# EAGLE board Sensors Panel (EAGLE 5.10), part 1 of 2
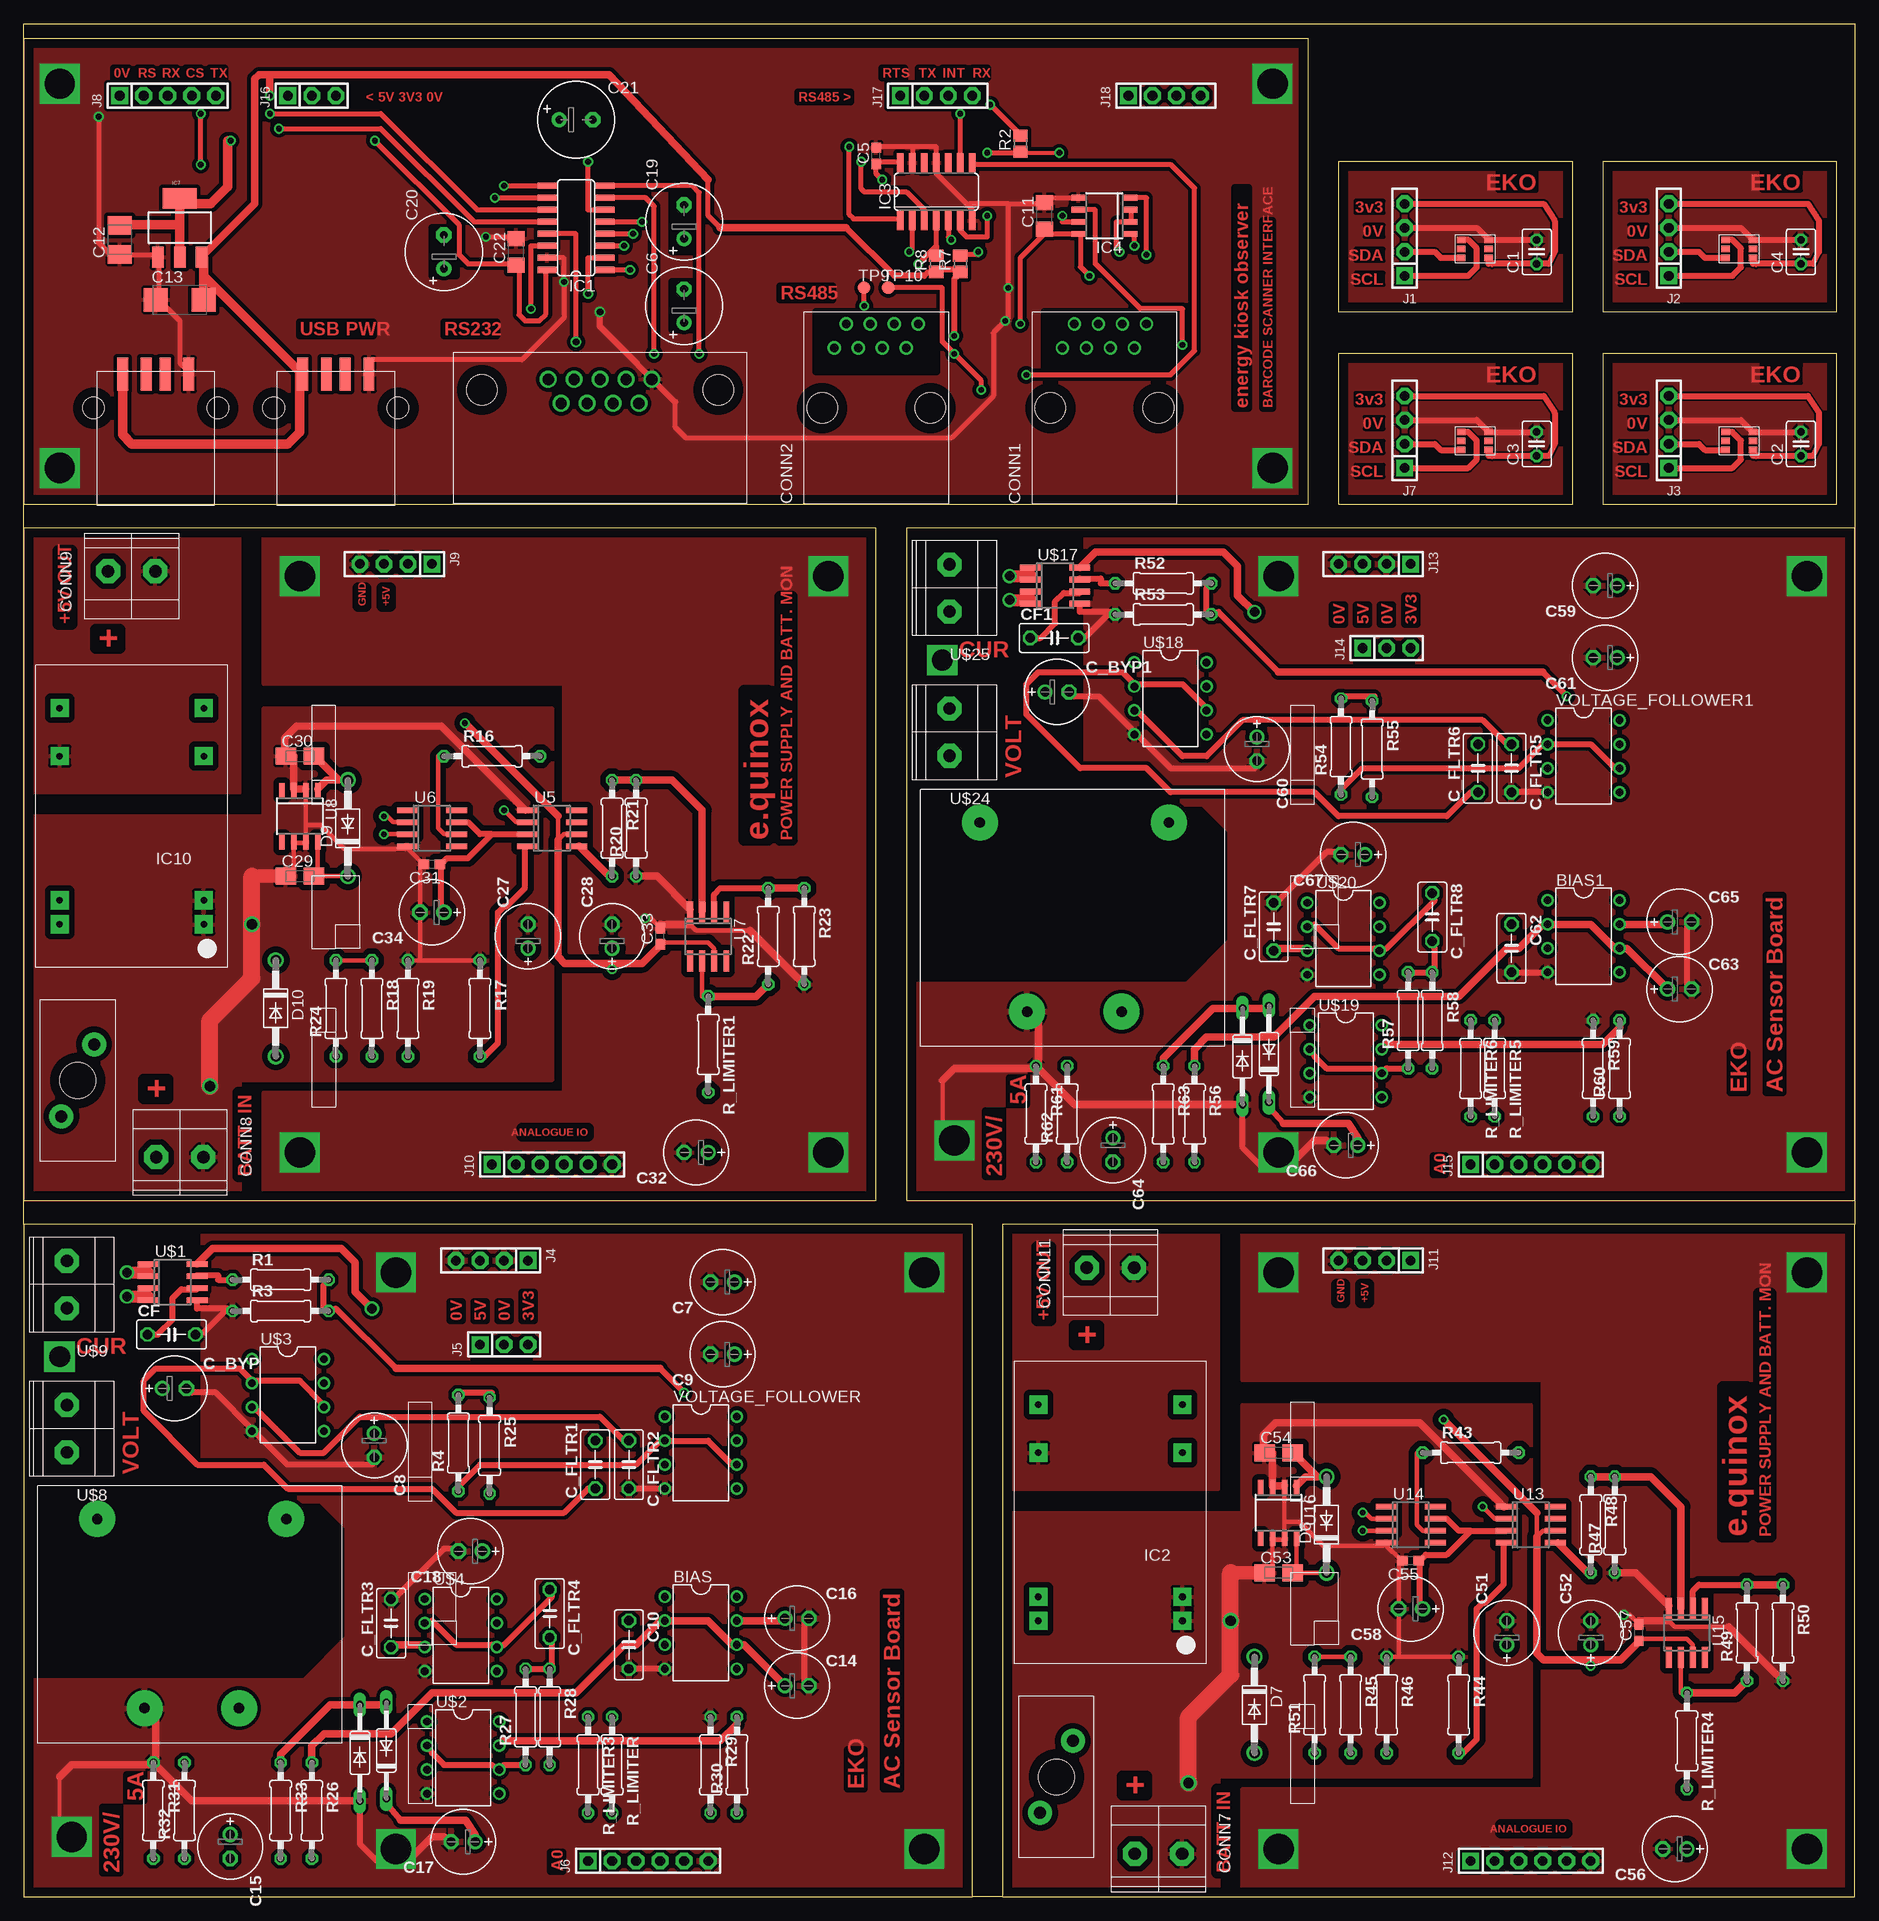
[diagram p0: board, top side]
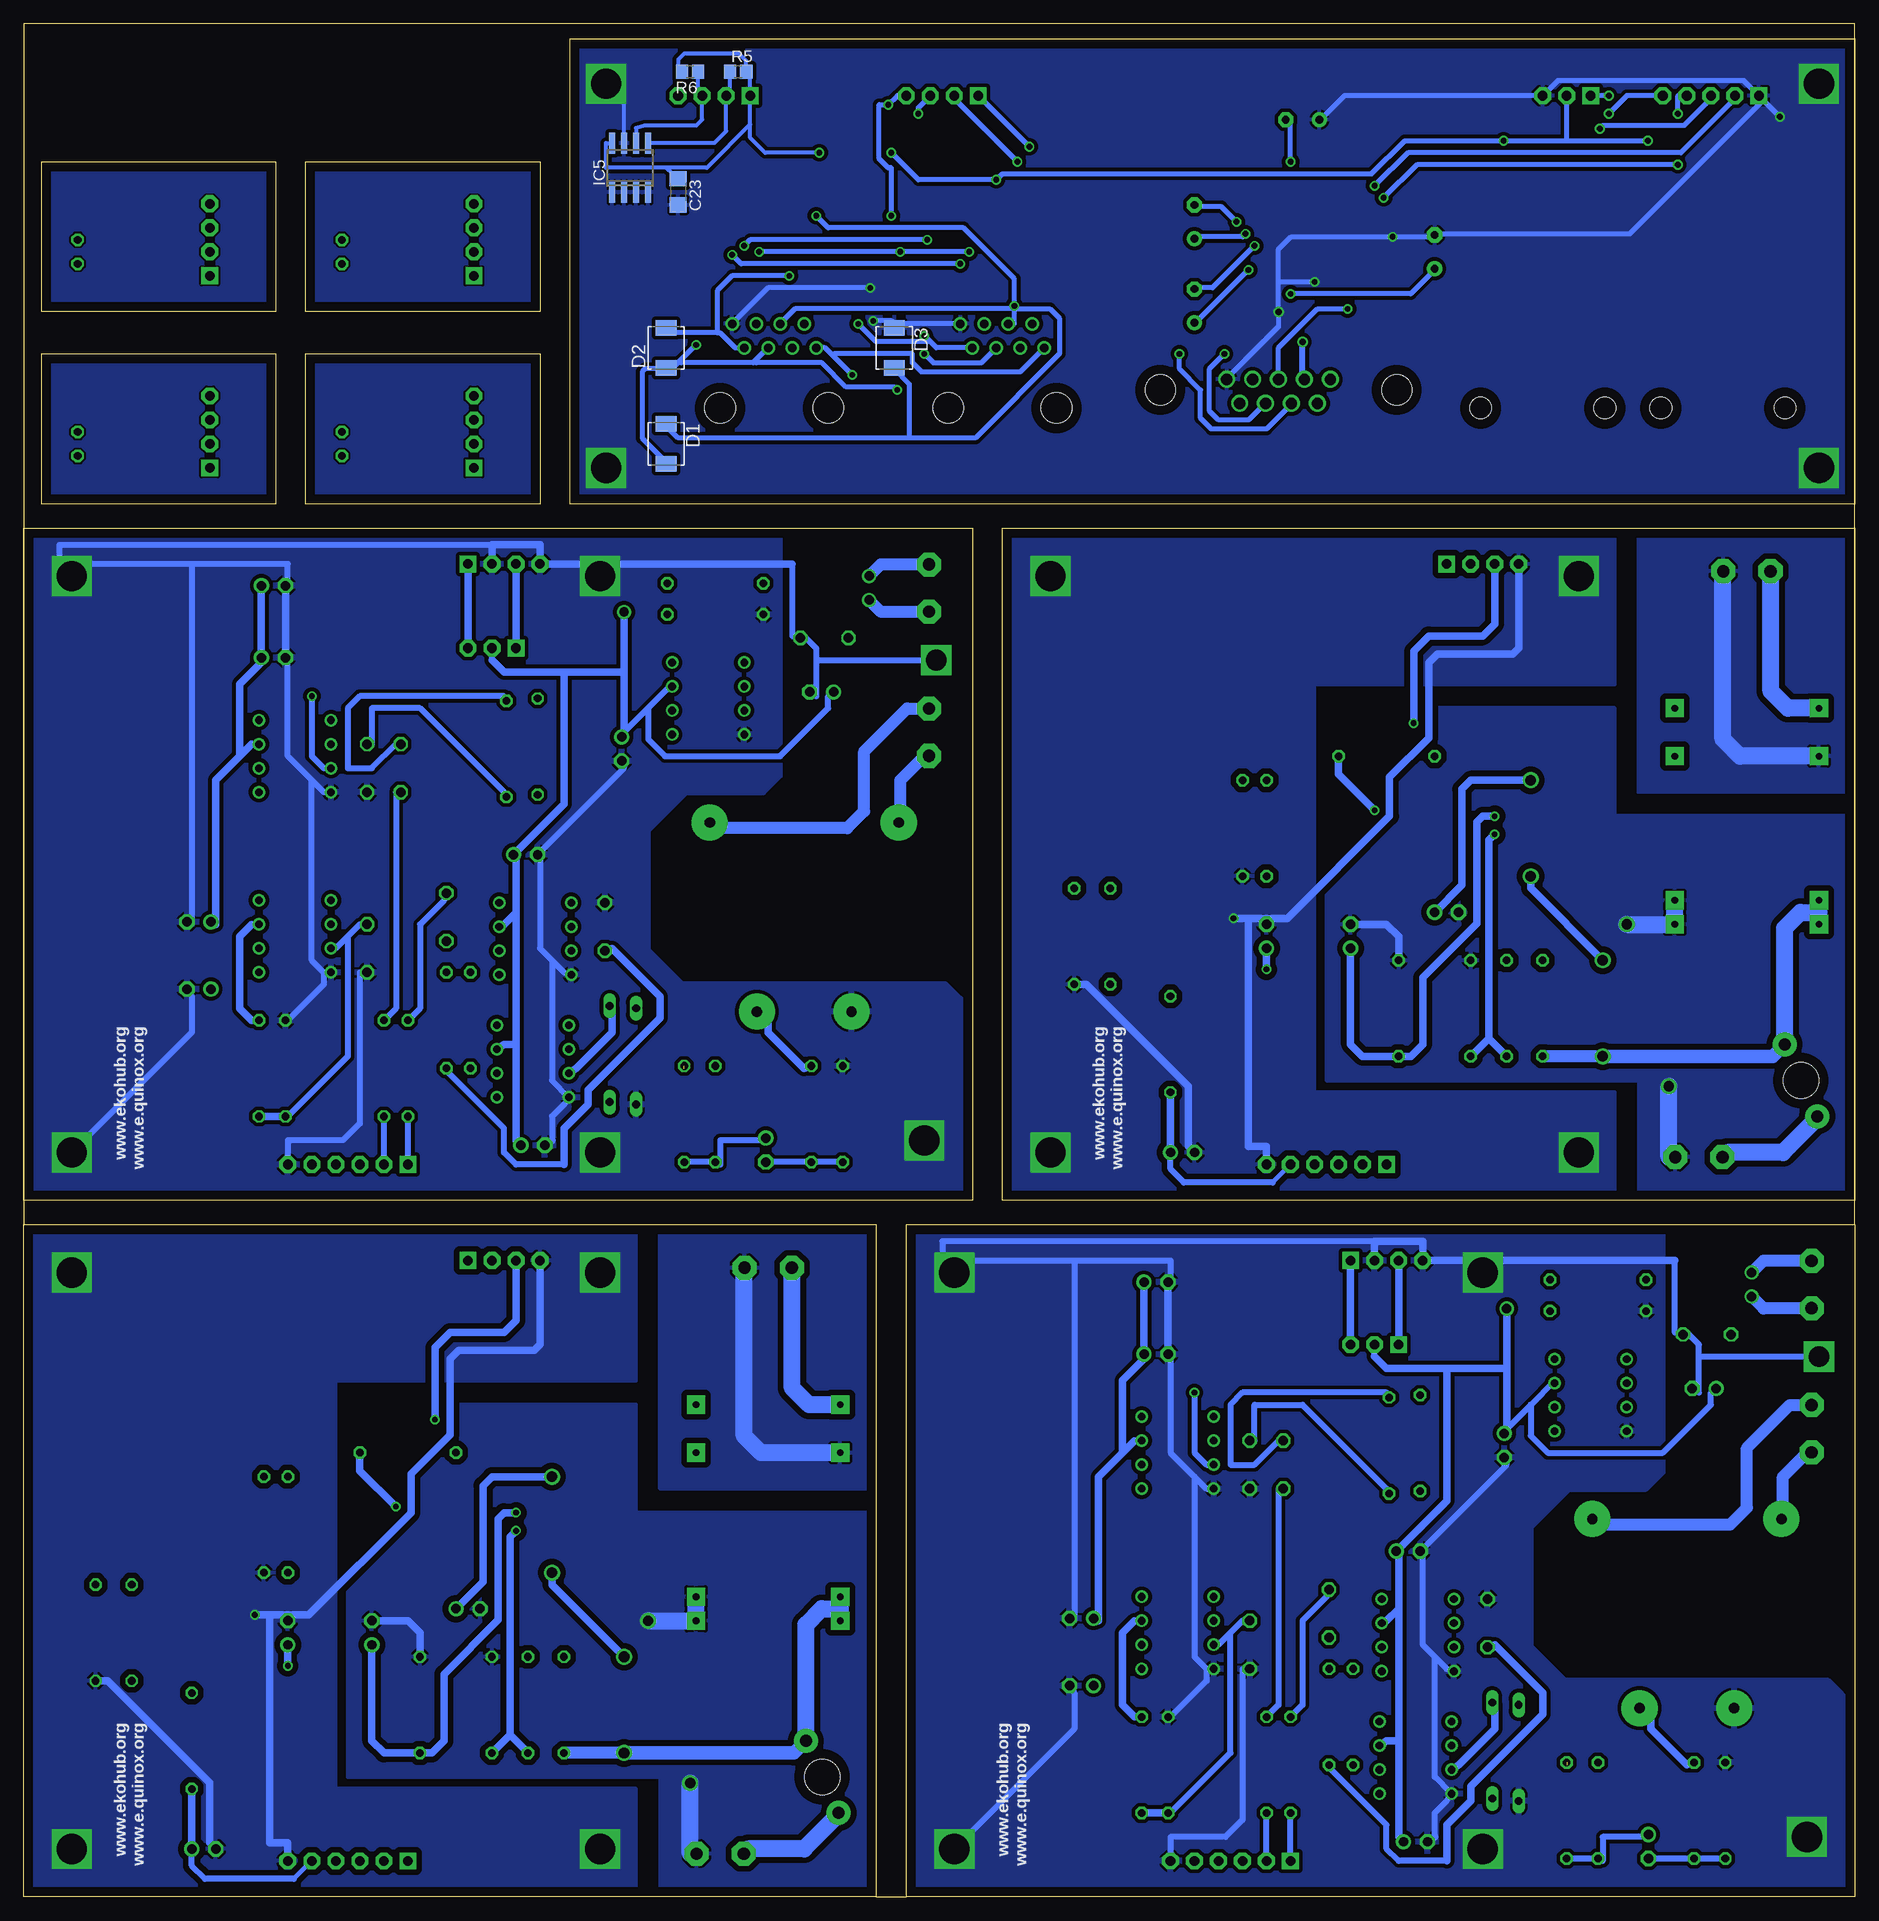
[diagram p1: board, bottom side, seen from below]

Size 193.68 x 198.12 mm. Coordinates in mm from the lower left corner, seen from the top.
Outline: 0,71.12 0,198.12 193.68,198.12 193.68,71.12
Outline: 103.5,0 100.33,0
Outline: 100.33,0 100.33,71.12 0,71.12
Outline: 0,71.12 0,0 100.33,0
Outline: 193.68,71.12 193.68,0 103.5,0
Outline: 193.68,71.12 103.5,71.12 103.5,0
Outline: 90.17,73.66 90.17,144.78 0,144.78 0,73.66 90.17,73.66
Outline: 193.68,73.66 193.68,144.78 93.34,144.78 93.34,73.66 193.68,73.66
Outline: 191.77,167.64 191.77,183.51 167,183.51 167,167.64 191.77,167.64
Outline: 163.83,167.64 163.83,183.51 139.06,183.51 139.06,167.64 163.83,167.64
Outline: 191.77,147.32 191.77,163.19 167,163.19 167,147.32 191.77,147.32
Outline: 163.83,147.32 163.83,163.19 139.06,163.19 139.06,147.32 163.83,147.32
Outline: 0,147.32 135.87,147.32 135.87,196.52 0,196.52 0,147.32
Copper layers (1*16): Top 0.035mm / dielectric 1.5mm / Bottom 0.035mm
Design rules "default": minimum track width 10mil, minimum drill 24mil, track to track 8mil, track to pad 8mil, pad to pad 8mil, via to via 8mil, smd to smd 8mil, copper to edge 40mil, drill to drill 8mil, minimum pad ring 10mil, minimum via ring 8mil, stop-mask expansion 4mil, vias tented up to drill 0mil, thermal gap 10mil
tRestrict: area 83.8,161.3 to 96.5,167.6; area 108,161.3 to 120.7,167.6; area 68.6,174 to 71.1,180.3; area 43.2,171.5 to 45.7,176.5; area 68.6,165.7 to 71.1,170.8; area 55.9,186.7 to 61,189.2; area 91.4,189.2 to 101.6,191.8; area 26.7,189.2 to 34.3,191.8; area 8.9,189.2 to 21.6,191.8
vRestrict: area 25.4,48.3 to 30.5,58.4; area 43.2,8.9 to 50.8,20.3; area 43.2,21.6 to 49.5,33; area 67.1,41.9 to 74.7,52.1; area 68.6,22.9 to 74.9,33; area 118.7,121.9 to 123.8,132.1; area 136.5,82.5 to 144.1,94; area 136.5,95.3 to 142.9,106.7; area 160.4,115.6 to 168,125.7; area 161.9,96.5 to 168.3,106.7; area 26.7,147.3 to 39.4,161.3; area 7.6,147.3 to 20.3,161.3; 10 more areas

## Footprints (pad centres in the part's own frame; a part is rotated, then mirrored left to right if it is on the bottom)
PDIP8 = drill 0.813 pad 1.27 round: 1 -3.81,-3.81; 2 -1.27,-3.81; 3 1.27,-3.81; 4 3.81,-3.81; 5 3.81,3.81; 6 1.27,3.81; 7 -1.27,3.81; 8 -3.81,3.81
C025-030X050 = drill 0.813 octagon: 1 -1.27,0; 2 1.27,0
C0603 = smd 1.1 x 1: 1 -0.85,0; 2 0.85,0
E3,5-8 = drill 0.813 pad 1.6 round: + -1.778,0 | drill 0.813 pad 1.6 octagon: - 1.778,0
E2,5-7---100UF = drill 1 pad 1.6 round: + -1.27,0 | drill 1 pad 1.6 octagon: - 1.27,0
C050-030-075 = drill 1 octagon: 1 -2.54,0; 2 2.54,0
C1206 = smd 1.6 x 1.8: 1 -1.4,0; 2 1.4,0
B/3528-21R = smd 1.95 x 2.5: + 1.525,0; - -1.525,0
C/6032-28R = smd 2.55 x 2.5: + 2.525,0; - -2.525,0
A/3216-18W = smd 2.15 x 1.8: + 1.475,0; - -1.475,0
MHRJJ8NFRA = drill 0.9 round: P$1 -4.445,6.35; P$2 -3.175,8.89; P$3 -1.905,6.35; P$4 -0.635,8.89; P$5 0.635,6.35; P$6 1.905,8.89; P$7 3.175,6.35; P$8 4.445,8.89 | hole 3.25: -5.715,0; 5.715,0
CTB1500-2 = drill 1.3 pad 2.54 octagon: P$1 -2.5,0.5; P$2 2.5,0.5
LTF153008 = drill 1.27 pad 2.54 round: 1 1.73,3.81; 2 -1.73,-3.81 | hole 3.78: 0,0
SMB = smd 1.62 x 2.18: 1 -2.11,0; 2 2.11,0
DO41-10 = drill 1.118 round: A 5.08,0; C -5.08,0
SO16 = smd 0.66 x 2.032: 1 -4.445,-3.073; 2 -3.175,-3.073; 3 -1.905,-3.073; 4 -0.635,-3.073; 5 0.635,-3.073; 6 1.905,-3.073; 7 3.175,-3.073; 8 4.445,-3.073; 9 4.445,3.073; 10 3.175,3.073; 11 1.905,3.073; 12 0.635,3.073; 13 -0.635,3.073; 14 -1.905,3.073; 15 -3.175,3.073; 16 -4.445,3.073
TEL_5_SERIES = drill 0.7 pad 1.93 square: 2 -11.43,-7.62; 3 -8.89,-7.62; 9 6.35,-7.62; 11 11.43,-7.62; 14 11.43,7.62; 16 6.35,7.62; 22 -8.89,7.62; 23 -11.43,7.62
SO14 = smd 0.66 x 2.032: 1 -3.81,-3.073; 2 -2.54,-3.073; 3 -1.27,-3.073; 4 0,-3.073; 5 1.27,-3.073; 6 2.54,-3.073; 7 3.81,-3.073; 8 3.81,3.073; 9 2.54,3.073; 10 1.27,3.073; 11 0,3.073; 12 -1.27,3.073; 13 -2.54,3.073; 14 -3.81,3.073
D_R-PDSO-G8 = smd 0.6 x 1.5: 1 -1.905,-2.75; 2 -0.635,-2.75; 3 0.635,-2.75; 4 1.905,-2.75; 5 1.905,2.75; 6 0.635,2.75; 7 -0.635,2.75; 8 -1.905,2.75
SO-08 = smd 0.6 x 2.2: 1 -1.905,-2.6; 2 -0.635,-2.6; 3 0.635,-2.6; 4 1.905,-2.6; 5 1.905,2.6; 6 0.635,2.6; 7 -0.635,2.6; 8 -1.905,2.6
SOT223 = smd 1.219 x 2.235: 1 -2.311,-3.099; 2 0,-3.099; 3 2.311,-3.099 | smd 3.6 x 2.2: 4 0,3.099
SIP-100-04-40 = drill 1.016 pad 1.778 square: 1 -3.81,0 | drill 1.016 pad 1.778 octagon: 2 -1.27,0; 3 1.27,0; 4 3.81,0
SIP-100-03-40 = drill 1.016 pad 1.778 square: 1 -2.54,0 | drill 1.016 pad 1.778 octagon: 2 0,0; 3 2.54,0
SIP-100-06-40 = drill 1.016 pad 1.778 square: 1 -6.35,0 | drill 1.016 pad 1.778 octagon: 2 -3.81,0; 3 -1.27,0; 4 1.27,0; 5 3.81,0; 6 6.35,0
SIP-100-05-40 = drill 1.016 pad 1.778 square: 1 -5.08,0 | drill 1.016 pad 1.778 octagon: 2 -2.54,0; 3 0,0; 4 2.54,0; 5 5.08,0
0207/10 = drill 0.8 octagon: 1 -5.08,0; 2 5.08,0
R0805 = smd 1.3 x 1.5: 1 -0.85,0; 2 0.85,0
DB9 = drill 1.19 round: 1 5.48,-1.12; 2 2.74,-1.12; 3 0,-1.12; 4 -2.74,-1.12; 5 -5.48,-1.12; 6 4.11,1.42; 7 1.37,1.42; 8 -1.37,1.42; 9 -4.11,1.42 | hole 3.2: -12.5,0; 12.5,0
TP13R = smd 1.3 x 1.3: TP 0,0
SO8 = smd 0.6 x 2.2: 1 -1.905,-2.6; 2 -0.635,-2.6; 3 0.635,-2.6; 4 1.905,-2.6; 5 1.905,2.6; 6 0.635,2.6; 7 -0.635,2.6; 8 -1.905,2.6
R_PDSO_G8 = smd 0.6 x 1.5: 1 -1.905,-2.75; 2 -0.635,-2.75; 3 0.635,-2.75; 4 1.905,-2.75; 5 1.905,2.75; 6 0.635,2.75; 7 -0.635,2.75; 8 -1.905,2.75
SOIC8 = smd 0.6 x 2.2: 1 -1.905,-2.6; 2 -0.635,-2.6; 3 0.635,-2.6; 4 1.905,-2.6; 5 1.905,2.6; 6 0.635,2.6; 7 -0.635,2.6; 8 -1.905,2.6
4408 = drill 1.1 pad 3.81 round: PIN1 -10,10; PIN5 10,10; PIN7 5,-10; PIN9 -5,-10
D035-10 = drill 0.813 long: A 4.318,0.762; C -5.842,0.762
TSL2561T = smd 0.9 x 0.7: ADDR_SEL 0,0.95; GND 0,0; INT 2.9,0.95; SCL 2.9,0; SDA 2.9,1.9; VDD 0,1.9
USB_SOCKET_LUMBERG = smd 1.15 x 3.5: 1 -3.5,3.56; 2 -1,3.56; 3 1,3.56; 4 3.5,3.56 | hole 2.3: -6.57,0; 6.57,0

## Placement (x,y rotation side)
BIAS  MCP601  [PDIP8]  71.63,27.94 270 top
BIAS1  MCP601  [PDIP8]  164.97,101.6 270 top
C1  [C025-030X050]  160.02,173.99 90 top
C2  [C025-030X050]  187.96,153.67 90 top
C3  [C025-030X050]  160.02,153.67 90 top
C4  [C025-030X050]  187.96,173.99 90 top
C5  [C0603]  90.17,184.15 90 top
C6  [E3,5-8]  69.85,168.28 90 top
C7  [E2,5-7---100UF]  73.91,65.02 180 top
C8  [E2,5-7---100UF]  37.08,47.75 270 top
C9  [E2,5-7---100UF]  73.91,57.4 180 top
C10  [C050-030-075]  64.01,26.67 270 top
C11  0.1uF  [C1206]  107.95,177.8 90 top
C12  100uF  [B/3528-21R]  10.16,175.26 90 top
C13  10uF  [C/6032-28R]  16.51,168.91 0 top
C14  [E2,5-7---100UF]  81.79,22.35 0 top
C15  [E2,5-7---100UF]  21.84,5.33 270 top
C16  [E2,5-7---100UF]  81.79,29.46 0 top
C17  [E2,5-7---100UF]  46.48,5.84 180 top
C18  [E2,5-7---100UF]  47.24,36.58 180 top
C19  [E3,5-8]  69.85,177.16 90 top
C20  [E3,5-8]  44.45,173.99 90 top
C21  [E3,5-8]  58.42,187.96 0 top
C22  0.1uF  [C1206]  52.07,173.99 90 top
C23  0.1uF  [C1206]  124.46,180.34 270 bottom
C27  [E2,5-7---100UF]  53.34,101.6 90 top
C28  [E2,5-7---100UF]  62.23,101.6 90 top
C29  0.33uF  [A/3216-18W]  29.21,107.95 0 top
C30  0.33uF  [A/3216-18W]  29.21,120.65 0 top
C31  [C0603]  43.18,109.22 180 top
C32  [E2,5-7---100UF]  71.12,78.74 180 top
C33  [C0603]  67.31,101.6 90 top
C34  [E2,5-7---100UF]  43.18,104.14 180 top
C51  [E2,5-7---100UF]  156.84,27.94 90 top
C52  [E2,5-7---100UF]  165.74,27.94 90 top
C53  0.33uF  [A/3216-18W]  132.72,34.29 0 top
C54  0.33uF  [A/3216-18W]  132.72,46.99 0 top
C55  [C0603]  146.69,35.56 180 top
C56  [E2,5-7---100UF]  174.62,5.08 180 top
C57  [C0603]  170.81,27.94 90 top
C58  [E2,5-7---100UF]  146.69,30.48 180 top
C59  [E2,5-7---100UF]  167.26,138.68 180 top
C60  [E2,5-7---100UF]  130.43,121.41 270 top
C61  [E2,5-7---100UF]  167.26,131.06 180 top
C62  [C050-030-075]  157.35,100.33 270 top
C63  [E2,5-7---100UF]  175.13,96.01 0 top
C64  [E2,5-7---100UF]  115.19,78.99 270 top
C65  [E2,5-7---100UF]  175.13,103.12 0 top
C66  [E2,5-7---100UF]  139.83,79.5 180 top
C67  [E2,5-7---100UF]  140.59,110.24 180 top
C_BYP  [E2,5-7---100UF]  15.94,53.79 0 top
C_BYP1  [E2,5-7---100UF]  109.29,127.45 0 top
C_FLTR1  [C050-030-075]  60.45,45.72 90 top
C_FLTR2  [C050-030-075]  64.01,45.72 270 top
C_FLTR3  [C050-030-075]  38.86,28.96 90 top
C_FLTR4  [C050-030-075]  55.63,29.97 270 top
C_FLTR5  [C050-030-075]  157.35,119.38 270 top
C_FLTR6  [C050-030-075]  153.8,119.38 90 top
C_FLTR7  [C050-030-075]  132.21,102.62 90 top
C_FLTR8  [C050-030-075]  148.97,103.63 270 top
CF  [C050-030-075]  15.64,59.49 0 top
CF1  [C050-030-075]  108.98,133.15 0 top
CONN1  MHRJJ88NFRA  [MHRJJ8NFRA]  114.3,157.48 0 top
CONN2  MHRJJ88NFRA  [MHRJJ8NFRA]  90.17,157.48 0 top
CONN7  CTB1500/2  [CTB1500-2]  120.02,5.08 180 top
CONN8  CTB1500/2  [CTB1500-2]  16.51,78.74 180 top
CONN9  CTB1500/2  [CTB1500-2]  11.43,139.7 0 top
CONN10  MINIBLADE_SOCKET  [LTF153008]  5.71,86.36 180 top
CONN11  CTB1500/2  [CTB1500-2]  114.94,66.04 0 top
CONN12  MINIBLADE_SOCKET  [LTF153008]  109.22,12.7 180 top
D1  P6SMB12CA  [SMB]  125.73,153.67 270 bottom
D2  P6SMB12CA  [SMB]  125.73,163.83 90 bottom
D3  P6SMB12CA  [SMB]  101.6,163.83 270 bottom
D6  1N4004  [DO41-10]  137.79,39.37 90 top
D7  1N4004  [DO41-10]  130.18,20.32 270 top
D9  1N4004  [DO41-10]  34.29,113.03 90 top
D10  1N4004  [DO41-10]  26.67,93.98 270 top
IC1  MAX3232CSE  [SO16]  58.42,176.53 90 top
IC2  [TEL_5_SERIES]  114.94,40.64 90 top
IC3  7407D  [SO14]  96.52,180.34 0 top
IC4  SP483E  [D_R-PDSO-G8]  114.3,177.8 90 top
IC5  24AA64SN  [SO-08]  129.54,182.88 0 bottom
IC7  TLV1117  [SOT223]  16.51,176.53 0 top
IC10  [TEL_5_SERIES]  11.43,114.3 90 top
J1  F-1X04-SIP-100-40  [SIP-100-04-40]  146.05,175.26 90 top
J2  F-1X04-SIP-100-40  [SIP-100-04-40]  173.99,175.26 90 top
J3  F-1X04-SIP-100-40  [SIP-100-04-40]  173.99,154.94 90 top
J4  F-1X04-SIP-100-40  [SIP-100-04-40]  49.53,67.31 180 top
J5  F-1X03-SIP-100-40  [SIP-100-03-40]  50.8,58.42 0 top
J6  F-1X06-SIP-100-40  [SIP-100-06-40]  66.04,3.81 0 top
J7  F-1X04-SIP-100-40  [SIP-100-04-40]  146.05,154.94 90 top
J8  F-1X05-SIP-100-40  [SIP-100-05-40]  15.24,190.5 0 top
J9  F-1X04-SIP-100-40  [SIP-100-04-40]  39.37,140.97 180 top
J10  F-1X06-SIP-100-40  [SIP-100-06-40]  55.88,77.47 0 top
J11  F-1X04-SIP-100-40  [SIP-100-04-40]  142.88,67.31 180 top
J12  F-1X06-SIP-100-40  [SIP-100-06-40]  159.38,3.81 0 top
J13  F-1X04-SIP-100-40  [SIP-100-04-40]  142.88,140.97 180 top
J14  F-1X03-SIP-100-40  [SIP-100-03-40]  144.15,132.08 0 top
J15  F-1X06-SIP-100-40  [SIP-100-06-40]  159.38,77.47 0 top
J16  F-1X03-SIP-100-40  [SIP-100-03-40]  30.48,190.5 0 top
J17  F-1X04-SIP-100-40  [SIP-100-04-40]  96.52,190.5 0 top
J18  F-1X04-SIP-100-40  [SIP-100-04-40]  120.65,190.5 0 top
R1  [0207/10]  27.18,65.28 0 top
R2  2.7K  [R0805]  105.41,185.42 90 top
R3  [0207/10]  27.18,61.98 0 top
R4  [0207/10]  45.97,48.01 90 top
R5  [R0805]  118.11,193.04 0 bottom
R6  [R0805]  123.19,193.04 180 bottom
R7  4.7k  [R0805]  99.06,172.72 90 top
R8  4.7k  [R0805]  96.52,172.72 90 top
R16  [0207/10]  49.53,120.65 0 top
R17  [0207/10]  48.26,93.98 270 top
R18  [0207/10]  36.83,93.98 270 top
R19  [0207/10]  40.64,93.98 270 top
R20  [0207/10]  64.77,113.03 90 top
R21  [0207/10]  62.23,113.03 270 top
R22  [0207/10]  78.74,101.6 90 top
R23  [0207/10]  82.55,101.6 270 top
R24  [0207/10]  33.02,93.98 90 top
R25  [0207/10]  49.28,47.75 270 top
R26  [0207/10]  30.48,9.14 270 top
R27  [0207/10]  53.09,19.05 90 top
R28  [0207/10]  55.63,19.05 270 top
R29  [0207/10]  72.64,13.97 270 top
R30  [0207/10]  75.44,13.97 90 top
R31  [0207/10]  13.72,9.14 270 top
R32  [0207/10]  17.02,9.14 90 top
R33  [0207/10]  27.18,9.14 270 top
R43  [0207/10]  153.03,46.99 0 top
R44  [0207/10]  151.76,20.32 270 top
R45  [0207/10]  140.34,20.32 270 top
R46  [0207/10]  144.15,20.32 270 top
R47  [0207/10]  168.28,39.37 90 top
R48  [0207/10]  165.74,39.37 270 top
R49  [0207/10]  182.25,27.94 90 top
R50  [0207/10]  186.06,27.94 270 top
R51  [0207/10]  136.53,20.32 90 top
R52  [0207/10]  120.52,138.94 0 top
R53  [0207/10]  120.52,135.64 0 top
R54  [0207/10]  139.32,121.67 90 top
R55  [0207/10]  142.62,121.41 270 top
R56  [0207/10]  123.83,82.8 270 top
R57  [0207/10]  146.43,92.71 90 top
R58  [0207/10]  148.97,92.71 270 top
R59  [0207/10]  165.99,87.63 270 top
R60  [0207/10]  168.78,87.63 90 top
R61  [0207/10]  107.06,82.8 270 top
R62  [0207/10]  110.36,82.8 90 top
R63  [0207/10]  120.52,82.8 270 top
R_LIMITER  [0207/10]  62.23,13.97 270 top
R_LIMITER1  [0207/10]  72.39,90.17 270 top
R_LIMITER3  [0207/10]  59.69,13.97 270 top
R_LIMITER4  [0207/10]  175.9,16.51 270 top
R_LIMITER5  [0207/10]  155.57,87.63 270 top
R_LIMITER6  [0207/10]  153.03,87.63 270 top
SERIAL1  DB9_CONN  [DB9]  60.96,159.38 180 top
TP9  TPTP13R  [TP13R]  88.9,170.18 0 top
TP10  TPTP13R  [TP13R]  91.44,170.18 0 top
U5  IL300  [SO8]  55.88,113.03 270 top
U6  MCP601  [SO8]  43.18,113.03 270 top
U7  MCP601  [SO8]  72.39,101.6 180 top
U8  UA7805  [R_PDSO_G8]  29.21,114.3 180 top
U13  IL300  [SO8]  159.38,39.37 270 top
U14  MCP601  [SO8]  146.69,39.37 270 top
U15  MCP601  [SO8]  175.9,27.94 180 top
U16  UA7805  [R_PDSO_G8]  132.72,40.64 180 top
U$1  ACS712  [SOIC8]  15.75,65.02 270 top
U$2  MCP601  [PDIP8]  46.48,14.73 270 top
U$3  MCP601  [PDIP8]  27.94,53.09 270 top
U$4  MCP601  [PDIP8]  46.23,27.69 270 top
U$5  [4408]  17.78,29.97 0 top
U$6  SD103A  [D035-10]  39.12,16.26 90 top
U$7  SD103A  [D035-10]  34.8,14.48 270 top
U$8  CTB1500/2  [CTB1500-2]  5.08,49.53 90 top
U$9  CTB1500/2  [CTB1500-2]  5.08,64.77 90 top
U$10  TSL2561T  [TSL2561T]  182.88,175.26 180 top
U$11  TSL2561T  [TSL2561T]  154.94,175.26 180 top
U$12  TSL2561T  [TSL2561T]  182.88,154.94 180 top
U$13  TSL2561T  [TSL2561T]  154.94,154.94 180 top
U$17  ACS712  [SOIC8]  109.09,138.68 270 top
U$18  MCP601  [PDIP8]  121.28,126.75 270 top
U$19  MCP601  [PDIP8]  139.83,88.39 270 top
U$20  MCP601  [PDIP8]  139.57,101.35 270 top
U$21  [4408]  111.12,103.63 0 top
U$22  SD103A  [D035-10]  132.46,89.92 90 top
U$23  SD103A  [D035-10]  128.14,88.14 270 top
U$24  CTB1500/2  [CTB1500-2]  98.42,123.19 90 top
U$25  CTB1500/2  [CTB1500-2]  98.42,138.43 90 top
USB1  USB_SOCKET_LUMBERG  [USB_SOCKET_LUMBERG]  13.97,157.48 0 top
USB2  USB_SOCKET_LUMBERG  [USB_SOCKET_LUMBERG]  33.02,157.48 0 top
VOLTAGE_FOLLOWER  MCP601  [PDIP8]  71.63,46.99 270 top
VOLTAGE_FOLLOWER1  MCP601  [PDIP8]  164.97,120.65 270 top

## Library data of the parts
BIAS BIAS1 U$1-U$7 U$17-U$23 VOLTAGE_FOLLOWER VOLTAGE_FOLLOWER1 = Pauls_parts
C1-C6 C11-C13 C19-C23 C29-C31 C33 C53-C55 C57 R2 R5-R8 = resistor
C7-C10 C14-C18 C27 C28 C32 C34 C51 C52 C56 C58-C67 C_BYP C_BYP1 C_FLTR1-C_FLTR8 CF CF1 R1 R3 R4 R16-R33 R43-R63 R_LIMITER R_LIMITER1 R_LIMITER3-R_LIMITER6 = ee2parts
CONN1 CONN2 CONN7-CONN12 SERIAL1 U5-U8 U13-U16 U$8 U$9 U$24 U$25 USB1 USB2 = eko-parts
D1-D3 = _hhn_suppressor_SMAJ_SM6T_P6SMB
D6 D7 D9 D10 = diode
IC1 = maxim
IC2 IC10 = traco_thl_tel_series
IC3 = 74xx-eu
IC4 = 751xx
IC5 = microchip
IC7 = SparkFun
J1-J18 = con-headers-jp
TP9 TP10 = testpad
U$10-U$13 = atmospheric

## Nets
0V: C5.2 C11.2 C12.- C13.- C20.- C21.+ C22.2 C23.2 CONN1.P$8 CONN2.P$8 D3.1 IC1.15 IC3.7 IC3.11 IC3.13 IC4.5 IC5.1 IC5.2 IC5.3 IC5.4 IC5.7 IC7.1 J8.1 J16.3 SERIAL1.5 USB1.4 USB2.4
!UART_RTS!: IC3.1 J17.1
+3V1: J4.1 J5.3
+3V2: J13.1 J14.3
+3V3: C4.1 J2.4 U$10.VDD
+3V4: C1.1 J1.4 U$11.VDD
+3V5: C2.1 J3.4 U$12.VDD
+3V6: C3.1 J7.4 U$13.VDD
+3V7: C5.1 C12.+ C22.1 C23.1 IC1.16 IC3.14 IC5.8 IC7.2 IC7.4 J16.2 J18.1 R2.1 R5.2 R6.2
+5V: C11.1 C13.+ CONN1.P$7 CONN2.P$7 D2.2 IC4.8 IC7.3 J16.1 R7.1 R8.1 USB1.1 USB2.1
+5V1: J4.3 J5.1
+5V2: J13.3 J14.1
+5V/1: C54.+ C55.1 C58.+ D6.A U13.3 U14.7 U16.1
+5V/4: C30.+ C31.1 C34.+ D9.A U5.3 U6.7 U8.1
+5V/5: CONN9.P$1 IC10.14
+5V/6: C28.+ C33.1 J9.3 U5.6 U7.7
+5V/7: CONN11.P$1 IC2.14
+5V/8: C52.+ C57.1 J11.3 U13.6 U15.7
ANALOGUE_OUT1: C32.+ J10.5 R_LIMITER1.2
ANALOGUE_OUT2: C56.+ J12.5 R_LIMITER4.2
BUS_INT1: IC3.9 J17.3
CTS_BR_3V3: IC1.10 J8.4
CTS_DB9: IC1.7 SERIAL1.8
DA: CONN1.P$5 CONN2.P$5 D1.2 D2.1 IC4.6 TP10.TP
DB: CONN1.P$4 CONN2.P$4 D1.1 D3.2 IC4.7 TP9.TP
GND: BIAS.4 C7.- C8.- C9.- C10.2 C14.- C16.- C17.- C18.- C_BYP.- C_FLTR2.2 C_FLTR3.2 CF.2 J4.2 J4.4 J6.6 R3.1 R29.1 R31.1 U$1.5 U$2.4 U$3.4 U$4.4 U$5.PIN9 U$7.A VOLTAGE_FOLLOWER.4
GND1: CONN11.P$2 IC2.16
GND2: C4.2 J2.3 U$10.GND
GND3: C1.2 J1.3 U$11.GND
GND4: CONN9.P$2 IC10.16
GND5: C27.- C29.- C30.- C31.2 C34.- CONN8.P$1 IC10.2 IC10.3 R17.1 R19.1 U5.1 U6.4 U8.2 U8.3 U8.6 U8.7
GND6: C28.- C32.- C33.2 J9.4 J10.6 R20.1 R23.2 U7.4
GND7: C51.- C53.- C54.- C55.2 C58.- CONN7.P$1 IC2.2 IC2.3 R44.1 R46.1 U13.1 U14.4 U16.2 U16.3 U16.6 U16.7
GND8: C52.- C56.- C57.2 J11.4 J12.6 R47.1 R50.2 U15.4
GND9: BIAS1.4 C59.- C60.- C61.- C62.2 C63.- C65.- C66.- C67.- C_BYP1.- C_FLTR5.2 C_FLTR7.2 CF1.2 J13.2 J13.4 J15.6 R53.1 R59.1 R61.1 U$17.5 U$18.4 U$19.4 U$20.4 U$21.PIN9 U$23.A VOLTAGE_FOLLOWER1.4
GND10: C2.2 J3.3 U$12.GND
GND11: C3.2 J7.3 U$13.GND
I_IN1: U$1.1 U$1.2 U$9.P$2
I_IN2: U$1.3 U$1.4 U$9.P$1
I_IN3: U$17.1 U$17.2 U$25.P$2
I_IN4: U$17.3 U$17.4 U$25.P$1
I_OUT: J6.2 R_LIMITER.2
I_OUT4: J15.2 R_LIMITER5.2
INTR: CONN1.P$1 CONN2.P$1 IC3.8
N$5: CF.1 U$1.6
N$6: R4.1 VOLTAGE_FOLLOWER.2 VOLTAGE_FOLLOWER.6
N$7: C6.+ IC1.1
N$8: C6.- IC1.3
N$9: R1.2 R3.2 VOLTAGE_FOLLOWER.3
N$10: R1.1 U$1.7
N$11: C_FLTR1.1 R_LIMITER.1 U$3.2 U$3.6
N$12: C_FLTR1.2 R4.2 R25.1
N$13: C19.+ IC1.4
N$14: C19.- IC1.5
N$15: C21.- IC1.6
N$17: C20.+ IC1.2
N$18: IC5.5 J18.2 R5.1
N$20: IC5.6 J18.3 R6.1
N$21: J18.4
N$23: R16.1 U6.6
N$24: C27.+ R17.2 U5.4 U6.2
N$25: R16.2 U5.2
N$26: R22.1 R_LIMITER1.1 U7.6
N$27: R18.2 R19.2 U6.3
N$28: C29.+ D9.C D10.C U8.8
N$29: R21.2 U5.5
N$30: R22.2 R23.1 U7.2
N$31: R18.1 R24.2
N$32: CONN8.P$2 CONN10.1
N$33: C_FLTR2.1 R25.2 U$3.3
N$34: BIAS.3 C10.1 R29.2 R30.1
N$35: BIAS.2 BIAS.6 C14.+ R26.1
N$36: R33.1 U$2.3 U$6.A U$7.C
N$37: R27.1 U$2.2 U$2.6
N$38: C_FLTR4.1 R_LIMITER3.1 U$4.2 U$4.6
N$39: C_FLTR4.2 R27.2 R28.1
N$40: C_FLTR3.1 R28.2 U$4.3
N$41: C15.- R31.2 R32.1
N$42: R32.2 U$5.PIN7
N$43: C15.+ R26.2 R33.2
N$65: R43.1 U14.6
N$66: C51.+ R44.2 U13.4 U14.2
N$67: R43.2 U13.2
N$68: R49.1 R_LIMITER4.1 U15.6
N$69: R45.2 R46.2 U14.3
N$70: C53.+ D6.C D7.C U16.8
N$71: R48.2 U13.5
N$72: R49.2 R50.1 U15.2
N$73: R45.1 R51.2
N$74: CONN7.P$2 CONN12.1
N$75: CF1.1 U$17.6
N$76: R54.1 VOLTAGE_FOLLOWER1.2 VOLTAGE_FOLLOWER1.6
N$77: R52.2 R53.2 VOLTAGE_FOLLOWER1.3
N$78: R52.1 U$17.7
N$79: C_FLTR6.1 R_LIMITER5.1 U$18.2 U$18.6
N$80: C_FLTR6.2 R54.2 R55.1
N$81: C_FLTR5.1 R55.2 U$18.3
N$82: BIAS1.3 C62.1 R59.2 R60.1
N$83: BIAS1.2 BIAS1.6 C63.+ R56.1
N$84: R63.1 U$19.3 U$22.A U$23.C
N$85: R57.1 U$19.2 U$19.6
N$86: C_FLTR8.1 R_LIMITER6.1 U$20.2 U$20.6
N$87: C_FLTR8.2 R57.2 R58.1
N$88: C_FLTR7.1 R58.2 U$20.3
N$89: C64.- R61.2 R62.1
N$90: R62.2 U$21.PIN7
N$91: C64.+ R56.2 R63.2
RTS_BR_3V3: IC1.9 J8.2
RTS_DB9: IC1.8 SERIAL1.7
RXD_BR_3V3: IC1.12 J8.3
RXD_DB9: IC1.13 SERIAL1.2
SCL: J2.1 U$10.SCL
SCL1: J1.1 U$11.SCL
SCL2: J3.1 U$12.SCL
SCL3: J7.1 U$13.SCL
SDA: J2.2 U$10.SDA
SDA1: J1.2 U$11.SDA
SDA2: J3.2 U$12.SDA
SDA3: J7.2 U$13.SDA
TXD_BR_3V3: IC1.11 J8.5
TXD_DB9: IC1.14 SERIAL1.3
U1: R20.2 R21.1 U7.3
U2: R47.2 R48.1 U15.3
UART_RTS_5V: IC3.2 IC4.2 IC4.3 R7.2
UART_RX: IC3.6 J17.4 R2.2
UART_RX_5V: IC3.5 IC4.1
UART_TX: IC3.3 J17.2
UART_TX_5V: IC3.4 IC4.4 R8.2
V+: BIAS.7 C7.+ C8.+ C9.+ C16.+ C17.+ C18.+ C_BYP.+ J5.2 R30.2 U$1.8 U$2.7 U$3.7 U$4.7 U$6.C VOLTAGE_FOLLOWER.7
V+1: BIAS1.7 C59.+ C60.+ C61.+ C65.+ C66.+ C67.+ C_BYP1.+ J14.2 R60.2 U$17.8 U$18.7 U$19.7 U$20.7 U$22.C VOLTAGE_FOLLOWER1.7
V+_STORAGE_BAT1: CONN10.2 D10.A IC10.22 IC10.23 R24.1
V+_STORAGE_BAT2: CONN12.2 D7.A IC2.22 IC2.23 R51.1
V_IN1: U$5.PIN5 U$8.P$2
V_IN2: U$5.PIN1 U$8.P$1
V_IN3: U$21.PIN5 U$24.P$2
V_IN4: U$21.PIN1 U$24.P$1
V_OUT: J6.1 R_LIMITER3.2
V_OUT2: J15.1 R_LIMITER6.2